# Altium PCB 400631.PcbDoc (part 6 of 8)
Units mm, origin at the board's own origin, x right, y up, seen from the top; angles counter-clockwise.
Board outline 136.53 x 63.5 mm, 4 copper layers (Top Layer, Mid-Layer 1, Mid-Layer 2, Bottom Layer), stack 1.52 mm thick; 366 components, 256 nets, 1485 pads, 1968 vias.
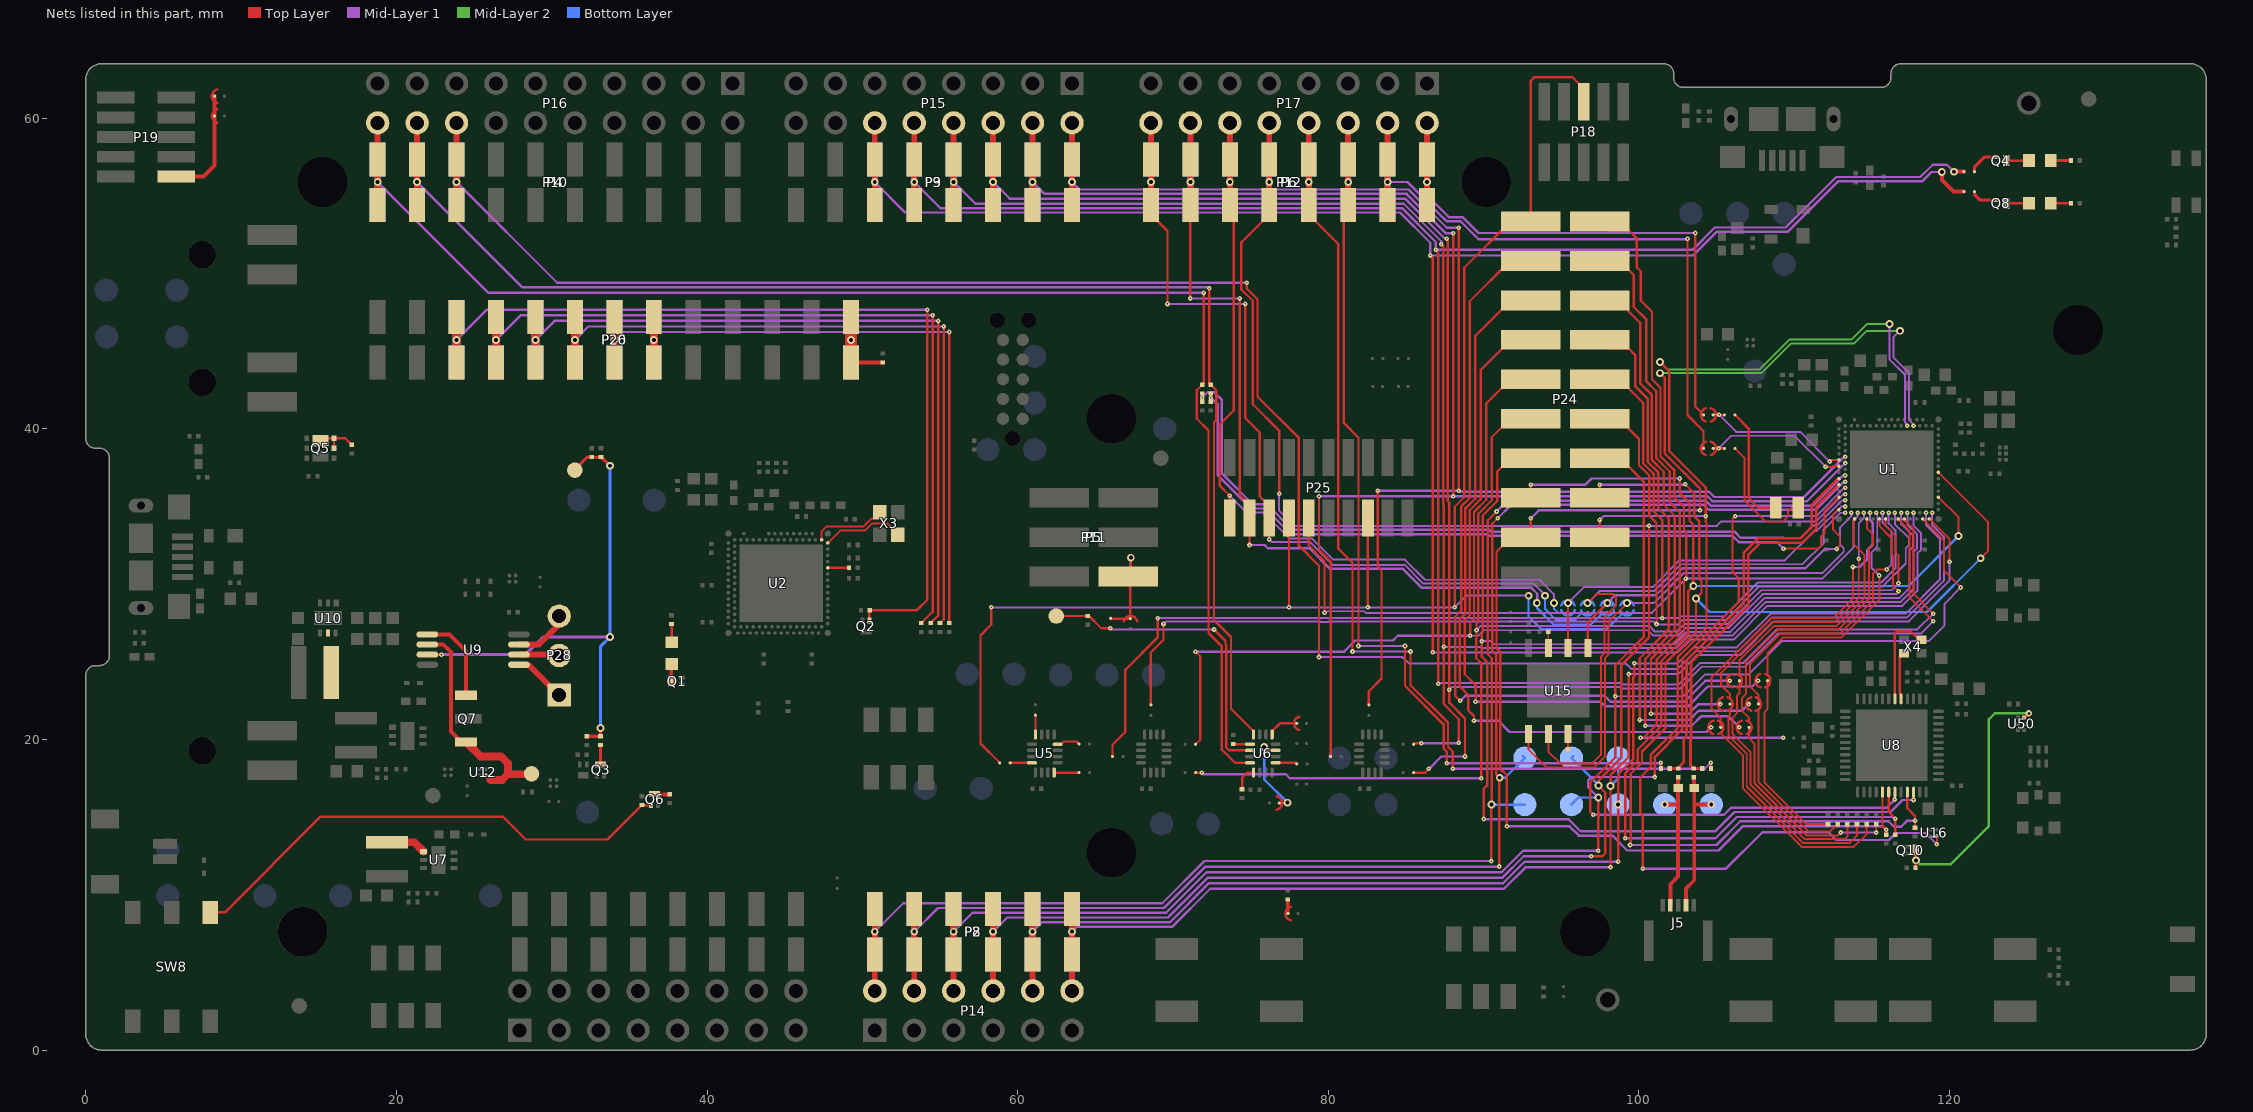
[diagram p6: the nets of this part, all layers, seen from the top]

## Via types
v1: diameter 0.5, hole 0.25, Top Layer to Bottom Layer, tented both sides, 1516 vias
v2: diameter 0.3, hole 0.1, Top Layer to Mid-Layer 1, tented top, 354 vias
v3: diameter 0.3, hole 0.1, Top Layer to Mid-Layer 1, tented both sides, 67 vias
v4: diameter 0.66, hole 0.33, Top Layer to Bottom Layer, tented both sides, 16 vias
v5: diameter 0.4, hole 0.2, Top Layer to Bottom Layer, tented both sides, 11 vias
v6: diameter 0.5, hole 0.3, Top Layer to Bottom Layer, tented both sides, 3 vias
v7: diameter 0.6, hole 0.3, Top Layer to Bottom Layer, tented both sides, 1 vias

## Nets (pads, with @x,y where several pads share a name; then routed paths per layer and width w, separated by ;. In a path a pad name is that pad's centre, name@x,y a point inside that pad or via, vN(x,y) a via of type N, cw(c..) or ccw(c..) an arc to the next point about the centre after c; other vN are vias at no path point) (continued)
NetL7_2: L7.2 U10.5
NetL8_1: L8.1 U7.1 | length 2.6
  Top Layer w0.508: L8.1@19.399,13.375 21.151,13.376 U7.1@21.751,12.775
NetLED1_1: LED1.1 Q4.3 | length 1.5
  Top Layer w0.152: Q4.3@123.65,57.261 125.104,57.261 LED1.1@125.109,57.266
NetLED1_2: LED1.2 R2.1 | length 1.3
  Top Layer w0.203: LED1.2@126.506,57.266 R2.1@127.808,57.266
NetLED2_1: LED2.1 Q8.3 | length 1.5
  Top Layer w0.152: Q8.3@123.65,54.511 125.104,54.511 LED2.1@125.109,54.516
NetLED2_2: LED2.2 R3.1 | length 1.3
  Top Layer w0.152: LED2.2@126.506,54.516 R3.1@127.808,54.516
NetLED5_1: LED5.1 Q1.3 | length 1.1
  Top Layer w0.203: Q1.3@37.699,23.749 37.699,24.834 LED5.1@37.719,24.854
NetLED5_2: LED5.2 R7.1 | length 1.2
  Top Layer w0.165: LED5.2@37.719,26.251 R7.1@37.719,27.426
NetP5_6: P5.6 P11.6 SB32.2 SB33.1 | length 6.7
  Top Layer w0.152: SB33.1@66.065,27.795 66.091,27.77 66.906,27.77 SB32.2@67.259,27.77 67.252,27.777 67.252,27.944 67.252,30.348 P5.6@67.119,30.48 67.285,30.645 v1(67.285,31.699)
  Bottom Layer w0.152: v1(67.285,31.699) 67.285,30.917 P11.6@67.722,30.48
NetP6_3: P6.3 P12.3 P17.6 R42.1 | length 63
  Top Layer w0.152: P6.3@81.28,54.661 P6.3@81.28,54.415 81.001,54.136 81.001,40.361 81.94,39.421 v3(81.94,26.01) ; v2(84.938,26.01) 84.938,23.453 87.425,20.965 87.425,19.415 87.63,19.21 v2(87.63,18.466) ; v2@101.372,18.528 v2(101.4,18.5) 101.404,18.496 101.404,18.131 R42.1@101.409,18.126
  Top Layer w0.381: P6.3@81.28,54.661 v1(81.28,55.88) P6.3@81.28,57.345 P17.6@81.28,59.69
  Mid-Layer 1 w0.152: v3(81.94,26.01) v2(84.938,26.01) ; v2(87.63,18.466) 101.326,18.466 101.36,18.5 v2(101.4,18.5)
  Bottom Layer w0.381: P12.3@81.28,54.415 v1(81.28,55.88) P12.3@81.28,57.345
NetP6_4: P6.4 P12.4 P17.8 R45.1 | length 67.7
  Top Layer w0.152: P6.4@78.74,54.415 78.74,53.797 80.645,51.892 80.645,32.28 81.559,31.366 v3(81.559,25.654) ; v2(85.293,25.654) 85.293,23.49 87.702,21.08 87.702,19.53 88.011,19.222 v2(88.011,18.11) ; v2(104.625,18.5) 104.635,18.49 104.635,18.136 R45.1@104.646,18.126
  Top Layer w0.381: P6.4@78.74,54.415 v1(78.74,55.88) P6.4@78.74,57.345 P17.8@78.74,59.69
  Mid-Layer 1 w0.152: v3(81.559,25.654) v2(85.293,25.654) ; v2(88.011,18.11) 104.235,18.11 v2(104.625,18.5)
  Bottom Layer w0.381: P12.4@78.74,54.415 v1(78.74,55.88) P12.4@78.74,57.345
NetP19_1: P19.1 SB19.2 SB47.2 | length 8.2
  Top Layer w0.254: P19.1@5.836,56.236 7.595,56.236 8.298,56.939 8.298,60.785 ; 8.298,59.785 SB19.2@8.298,60.138 8.298,60.491 8.298,61.055 SB47.2@8.298,61.408
NetP20_3: P20.3 P26.3 Q2.1 R25.1 | length 60.3
  Top Layer w0.152: Q2.1@50.453,27.636 50.453,28.298 R25.1@50.475,28.321 53.518,28.321 54.178,28.981 v3(54.178,47.65)
  Top Layer w0.508: P20.3@23.876,44.255 v1(23.876,45.72) P20.3@23.876,47.185
  Mid-Layer 1 w0.152: v1(23.876,45.72) 25.806,47.65 v3(54.178,47.65)
  Bottom Layer w0.508: P26.3@23.876,44.255 v1(23.876,45.72) P26.3@23.876,47.185
NetP20_4: P20.4 P26.4 R19.2 | length 54.6
  Top Layer w0.152: R19.2@53.797,27.488 54.534,28.225 v2(54.534,47.295)
  Top Layer w0.508: P20.4@26.416,44.348 P20.4@26.416,47.185
  Mid-Layer 1 w0.152: v1(26.416,45.72) 27.991,47.295 v2(54.534,47.295)
  Bottom Layer w0.508: P26.4@26.416,44.255 v1(26.416,45.72) P26.4@26.416,47.185
NetP20_5: P20.5 P26.5 R21.2 | length 52
  Top Layer w0.152: R21.2@54.398,27.488 54.889,27.979 v3(54.889,46.939)
  Top Layer w0.508: P20.5@28.956,44.255 P20.5@28.956,47.185
  Mid-Layer 1 w0.152: v1(28.956,45.72) 30.175,46.939 v3(54.889,46.939)
  Bottom Layer w0.508: P26.5@28.956,44.255 v1(28.956,45.72) P26.5@28.956,47.185
NetP20_6: P20.6 P26.6 R22.2 | length 49.8
  Top Layer w0.152: P20.6@31.496,43.663 P20.6@31.496,44.255 ; R22.2@54.999,27.488 55.245,27.734 v3(55.245,46.584)
  Top Layer w0.508: P20.6@31.496,44.255 v1(31.496,45.72) P20.6@31.496,47.185
  Mid-Layer 1 w0.152: v1(31.496,45.72) 32.36,46.584 v3(55.245,46.584)
  Bottom Layer w0.508: P26.6@31.496,44.255 v1(31.496,45.72) P26.6@31.496,47.185
NetP20_7: P20.7 P26.7 R23.2 | length 47
  Top Layer w0.152: P20.7@34.036,43.663 P20.7@34.036,44.255 ; R23.2@55.601,27.488 v2(55.601,46.228)
  Top Layer w0.508: P20.7@34.036,44.255 v1(34.036,45.72) P20.7@34.036,47.185
  Mid-Layer 1 w0.152: v1(34.036,45.72) 34.544,46.228 v2(55.601,46.228)
  Bottom Layer w0.508: P26.7@34.036,44.255 v1(34.036,45.72) P26.7@34.036,47.185
NetP20_8: P20.8 P26.8 | length 6.5
  Top Layer w0.152: P20.8@36.576,43.637 P20.8@36.576,44.255
  Top Layer w0.508: P20.8@36.576,44.255 v1(36.576,45.72) P20.8@36.576,47.185
  Bottom Layer w0.508: P26.8@36.576,44.255 v1(36.576,45.72) P26.8@36.576,47.185
NetP20_13: P20.13 P26.13 R75.2 | length 7.9
  Top Layer w0.254: P20.13@49.276,44.255 49.288,44.267 R75.2@51.308,44.267
  Top Layer w0.762: P20.13@49.276,44.255 P20.13@49.276,47.185
  Bottom Layer w0.762: P26.13@49.276,44.255 P26.13@49.276,47.185
  other v1: 49.276,45.72
NetP24_3: P24.3 SB22.2 | length 49.4
  Top Layer w0.152: v2(88.494,22.479) 88.175,22.798 88.175,27.9 88.55,28.275 88.55,34.987 89.103,35.54 89.103,48.209 91.694,50.8 P24.3@93.027,50.8
  Mid-Layer 1 w0.152: v2(88.494,22.479) 88.815,22.8 97.799,22.8 98.175,22.424 98.62,22.424 98.622,22.425 102.925,22.425 104.275,23.775 v2(105.838,23.775)
NetP24_4: P24.4 SB24.2 | length 37.5
  Top Layer w0.152: P24.4@97.472,50.8 98.031,50.241 99.314,50.241 99.665,49.89 99.665,47.835 100.475,47.025 100.475,43.05 101.111,42.414 101.111,38.109 101.985,37.235 101.985,37.198 101.991,37.192 101.991,35.259 102.625,34.625 102.625,27.015 100.775,25.165 v2(100.775,21.65)
  Mid-Layer 1 w0.152: v2(100.775,21.65) 103.2,21.65 103.8,22.25 105.213,22.25 v2(105.238,22.275)
NetP24_5: P24.5 SB25.2 | length 45.8
  Top Layer w0.152: v2(89.375,21.2) 89.375,21.5 89,21.875 89,22.593 89.002,22.595 89.002,22.873 88.473,23.402 88.473,27.69 88.475,27.692 88.475,27.75 88.825,28.1 88.825,28.158 88.827,28.16 88.827,34.872 89.459,35.503 89.459,45.974 91.745,48.26 P24.5@93.027,48.26
  Mid-Layer 1 w0.152: v2(89.375,21.2) 90.95,21.2 91.675,20.475 104.338,20.475 v2(104.638,20.775)
NetP24_6: P24.6 SB20.2 | length 37.5
  Top Layer w0.152: P24.6@97.472,48.26 98.742,48.26 99.301,47.701 99.301,47.599 100.075,46.825 100.075,42.925 100.833,42.167 100.833,37.994 101.6,37.227 101.6,35.1 102.3,34.4 102.3,27.083 100.4,25.183 100.4,21.397 100.401,21.395 100.401,21.105 100.4,21.103 v2(100.4,20.875)
  Mid-Layer 1 w0.152: v2(100.4,20.875) 103.4,20.875 104.025,21.5 105.738,21.5 v2(106.463,20.775)
NetP24_7: P24.7 SB21.2 | length 45.1
  Top Layer w0.152: v2(89.475,22.425) 89.484,22.434 89.484,23.491 88.783,24.192 88.783,27.666 89.102,27.985 89.102,28.043 89.105,28.045 89.105,34.757 89.814,35.466 89.814,43.79 91.745,45.72 P24.7@93.027,45.72
  Mid-Layer 1 w0.152: v2(89.475,22.425) 97.525,22.425 97.827,22.123 103.148,22.123 104.425,23.4 107.288,23.4 v2(107.663,23.775)
NetP24_8: P24.8 SB23.2 | length 35.3
  Top Layer w0.152: P24.8@97.472,45.72 98.031,45.161 99.339,45.161 99.75,44.751 99.75,42.75 100.556,41.944 100.556,37.879 101.25,37.185 101.25,34.875 101.925,34.2 101.925,27.1 100.05,25.225 v2(100.05,21.25)
  Mid-Layer 1 w0.152: v2(100.05,21.25) 103.25,21.25 103.85,21.85 106.638,21.85 v2(107.063,22.275)
NetP28_1: P28.1 U9.5 | length 3.4
  Top Layer w0.381: U9.5@27.893,24.806 28.509,24.806 30.455,22.86 P28.1@30.48,22.86
NetP28_2: P28.2 U9.6 | length 2.6
  Top Layer w0.381: U9.6@27.893,25.456 30.424,25.456 P28.2@30.48,25.4
NetP28_3: P28.3 U9.7 | length 3.7
  Top Layer w0.381: U9.7@27.893,26.106 29.179,26.106 30.48,27.407 P28.3@30.48,27.94
NetQ3_3: Q3.3 R12.2 | length 1.2
  Top Layer w0.203: Q3.3@33.147,18.384 R12.2@33.147,19.629
NetQ4_1: Q4.1 SB5.2 | length 1.9
  Top Layer w0.2: SB5.2@121.589,56.547 121.589,56.839 122.236,57.486 Q4.1@122.95,57.486
NetQ5_5: Q5.5 Q5.6 R51.2 | length 3
  Top Layer w0.152: Q5.6@15.113,39.21 15.288,39.385 Q5.6@15.988,39.385 Q5.6@16.058,39.385 ; Q5.5@16.063,38.735 15.988,38.81 15.988,39.31 16.063,39.385 16.704,39.385 17.046,39.043 17.046,39.028 17.105,38.969 R51.2@17.12,38.969
NetQ6_1: Q6.1 R61.1 SW8.4 | length 32.5
  Top Layer w0.152: SW8.4@8.028,8.859 8.959,8.859 15.125,15.025 26.85,15.025 28.325,13.55 33.596,13.55 R61.1@35.814,15.768 36.391,15.768 Q6.1@36.402,15.779
NetQ6_3: Q6.3 R58.2 | length 1
  Top Layer w0.254: Q6.3@36.627,16.479 36.641,16.465 R58.2@37.592,16.465
NetQ7_1: Q7.1 U9.1 | length 5.6
  Top Layer w0.254: U9.1@22.196,26.756 23.434,26.756 24.489,25.701 Q7.1@24.489,22.836
NetQ7_3: Q7.3 TP34.1 U9.2 U12.A1 | length 15
  Top Layer w0.25: U12.A1@25.778,17.682 26.065,17.394
  Top Layer w0.254: U9.2@22.196,26.106 23.018,26.106 23.51,25.614 23.51,20.509 24.182,19.836 Q7.3@24.489,19.836
  Top Layer w0.508: Q7.3@24.489,19.836 25.427,18.898 26.746,18.898 27.178,18.466 27.178,17.755 ; 26.065,17.394 26.818,17.394 27.178,17.755 ; TP34.1@28.651,17.856 28.55,17.755 27.178,17.755
NetQ8_1: Q8.1 SB6.2 | length 1.7
  Top Layer w0.2: SB6.2@121.589,55.27 121.589,55.086 121.939,54.736 Q8.1@122.95,54.736
NetQ10_3: Q10.3 R62.2 U50.6 | length 17
  Top Layer w0.152: R62.2@117.81,11.725 117.825,11.74 Q10.3@117.825,12.875 ; U50.6@124.8,21.4 124.849,21.449 124.887,21.449 125.1,21.662 v5(125.1,21.675)
  Mid-Layer 2 w0.152: v1(117.838,12.213) 118.1,11.95 120.05,11.95 122.525,14.425 122.525,21.3 122.9,21.675 v5(125.1,21.675)
NetR8_1: R8.1 R12.1 R70.1 R77.1 TP33.1 U9.3 | length 33.7
  Top Layer w0.152: R70.1@32.588,38.171 R77.1@33.172,38.171
  Top Layer w0.203: U9.3@21.993,25.456 v3(22.906,25.456) ; TP33.1@31.496,37.338 31.496,37.396 32.271,38.171 R70.1@32.588,38.171 ; R8.1@32.258,20.199 R12.1@33.147,20.199 v1(33.147,20.726) ; R77.1@33.172,38.171 33.203,38.171 v1(33.757,37.617)
  Mid-Layer 1 w0.203: v3(22.906,25.456) 28.301,25.456 29.439,26.594 v1(33.757,26.594)
  Bottom Layer w0.203: v1(33.147,20.726) 33.147,25.984 v1(33.757,26.594) v1(33.757,37.617)
NetR11_1: R11.1 U2.L31 | length 1.4
  Top Layer w0.152: U2.L31@47.776,31.048 49.055,31.048 R11.1@49.141,30.963
NetR47_1: R47.1 SB26.2 | length 0.9
  Top Layer w0.203: SB26.2@77.386,8.788 77.386,9.639 R47.1@77.394,9.646
NetR48_2: R48.2 U6.9 | length 1.1
  Top Layer w0.152: R48.2@73.889,19.705 73.902,19.691 U6.9@74.96,19.691
NetR49_2: R49.2 U6.13 | length 1.6
  Top Layer w0.152: R49.2@74.447,16.846 74.447,17.526 74.788,17.866 U6.13@75.185,17.866
NetR57_1: R57.1 SB33.2 TP19.1 U6.10 | length 20.1
  Top Layer w0.152: TP19.1@62.484,27.94 R57.1@64.592,27.94 ; R57.1@64.516,27.946 64.587,27.946 R57.1@64.592,27.94 ; SB33.2@66.046,27.153 v2(65.97,27.153) 65.38,27.153 R57.1@64.592,27.94 ; v2(72.644,27.076) 73.381,26.34 73.381,26.148 73.427,26.101 73.427,19.486 73.622,19.291 U6.10@74.96,19.291
  Mid-Layer 1 w0.152: v2@66.046,27.153 66.048,27.153 v2@66.073,27.127 ; v2@66.073,27.076 v2(72.644,27.076)
NetR65_1: R65.1 U15.3 | length 1
  Top Layer w0.125: R65.1@95.425,19.36 95.425,20.34 U15.3@95.435,20.35
NetR66_1: R66.1 U15.7 | length 1
  Top Layer w0.125: R66.1@94.16,26.925 94.16,25.895 U15.7@94.165,25.89
NetSB1_1: SB1.1 X2.1 | length 7.7
  Top Layer w0.152: SB1.1@106.18,40.894 107.061,40.013 107.061,35.535 107.682,34.914 X2.1@108.803,34.914
NetSB2_1: SB2.1 X2.2 | length 8.2
  Top Layer w0.125: SB2.1@106.18,38.735 106.782,38.133 106.782,35.382 108.153,34.011 109.245,34.011 109.601,34.366 109.601,34.671 109.844,34.914 X2.2@110.253,34.914
NetSB42_1: SB42.1 U6.1 | length 1.4
  Top Layer w0.152: U6.1@76.61,18.491 77.801,18.491 77.903,18.491 SB42.1@77.97,18.423
NetSB45_1: SB45.1 U6.5 | length 2
  Top Layer w0.152: U6.5@76.385,20.316 76.385,20.531 76.886,21.031 77.796,21.031 SB45.1@77.97,21.031
NetSB46_1: SB46.1 U6.3 | length 5.6
  Top Layer w0.152: v1(75.87,19.507) 76.086,19.291 U6.3@76.61,19.291 ; SB46.1@76.843,15.9 77.343,15.9 v1(77.368,15.926)
  Bottom Layer w0.152: v1(75.87,19.507) 75.87,17.424 v1(77.368,15.926)
NetSB54_2: SB54.2 U5.16 | length 1.6
  Top Layer w0.152: U5.16@62.347,17.866 62.357,17.856 SB54.2@63.95,17.856
NetSB55_2: SB55.2 U5.4 | length 1.5
  Top Layer w0.152: U5.4@62.572,19.691 62.795,19.691 62.967,19.863 63.797,19.863 SB55.2@63.95,19.71
NetSB56_2: SB56.2 U5.8 | length 1.2
  Top Layer w0.152: SB56.2@61.138,21.557 61.147,21.547 U5.8@61.147,20.316
NetSB57_2: SB57.2 U5.12 | length 1.4
  Top Layer w0.152: SB57.2@59.52,18.491 U5.12@60.922,18.491
NetU2_B30: U2.B30 X3.3 | length 4.6
  Top Layer w0.125: U2.B30@47.376,32.848 47.376,33.396 47.678,33.698 50.072,33.698 50.606,34.232 50.764,34.232 X3.3@51.011,34.48
NetU2_C31: U2.C31 X3.1 | length 5.3
  Top Layer w0.125: U2.C31@47.776,32.648 47.8,32.648 48.588,33.436 50.164,33.436 50.614,33.886 51.635,33.886 52.276,33.245 X3.1@52.276,33.178
NetU8_17: U8.17 X4.1 | length 3.1
  Top Layer w0.152: U8.17@116.878,22.609 116.878,22.872 116.799,22.951 116.799,25.349 116.875,25.425 X4.1@117.05,25.425
NetU8_18: U8.18 X4.3 | length 6.3
  Top Layer w0.152: U8.18@116.478,22.609 116.478,26.828 116.6,26.95 117.5,26.95 117.951,26.499 117.951,26.474 118.15,26.275 X4.3@118.2,26.275
NFC1: C43.1 J5.2 R43.1 TP17.1 | length 9.4
  Top Layer w0.25: v1(101.656,15.799) 102.425,15.799 102.524,15.7 ; J5.2@102.024,9.328 102.024,10.674 102.524,11.174 102.524,15.7 ; R43.1@102.522,17.563 C43.1@102.524,16.875 C43.1@102.524,16.875 102.524,15.7
NFC2: C44.2 J5.4 R46.1 TP18.1 | length 9.6
  Top Layer w0.25: J5.4@103.024,9.328 103.024,10.399 103.556,10.931 103.556,15.818 ; R46.1@103.532,17.563 103.532,16.899 C44.2@103.556,16.875 103.556,15.818 ; v1(104.656,15.799) 103.575,15.799 103.556,15.818
P0.00: P6.1 P12.1 P17.2 SB3.2 | length 39.3
  Top Layer w0.152: v2(103.624,52.601) 103.624,41.427 104.009,41.043 SB3.2@104.158,40.894
  Top Layer w0.381: P6.1@86.36,54.415 v1(86.36,55.88) P6.1@86.36,57.345 P17.2@86.36,59.69
  Mid-Layer 1 w0.152: v1(86.36,55.88) 86.36,55.016 87.751,53.625 88.639,53.625 89.662,52.601 v2(103.624,52.601)
  Bottom Layer w0.381: P12.1@86.36,54.415 v1(86.36,55.88) P12.1@86.36,57.345
P0.00/XL1: SB1.2 SB3.1 U1.N1 | length 9.7
  Top Layer w0.125: SB3.1@104.783,40.894 104.957,40.894 v2(105.156,40.894) SB1.2@105.504,40.894 ; v2(112.293,37.887) 112.395,37.989 U1.N1@112.878,37.989
  Mid-Layer 1 w0.125: v2(105.156,40.894) 106.248,39.802 110.379,39.802 v2(112.293,37.887)
P0.01: P6.2 P12.2 P17.4 SB4.2 | length 43
  Top Layer w0.152: v2(103.124,52.228) 103.124,40.876 104.158,39.842 SB4.2@104.158,38.735
  Top Layer w0.381: P6.2@83.82,54.415 v1(83.82,55.88) P6.2@83.82,57.345 P17.4@83.82,59.69
  Mid-Layer 1 w0.152: v1(83.82,55.88) 85.09,55.88 87.395,53.575 87.409,53.575 87.636,53.348 88.524,53.348 89.671,52.2 103.096,52.2 v2(103.124,52.228)
  Bottom Layer w0.381: P12.2@83.82,54.415 v1(83.82,55.88) P12.2@83.82,57.345
P0.01/XL2: SB2.2 SB4.1 U1.R1 | length 9.7
  Top Layer w0.125: v2(112.014,37.541) 112.446,37.541 112.493,37.589 U1.R1@112.878,37.589
  Top Layer w0.152: SB4.1@104.783,38.735 104.957,38.735 v2(105.131,38.735) SB2.2@105.504,38.735
  Mid-Layer 1 w0.125: v2(105.131,38.735) 105.943,39.548 110.007,39.548 v2(112.014,37.541)
P0.02/NFC1: R42.2 R43.2 U1.W1 | length 25.1
  Top Layer w0.165: R42.2@101.979,18.126 102.476,18.126 102.875,18.525 102.875,19.98 103.034,20.138 103.034,20.482 103.061,20.51 103.061,25.071 106.735,28.745 106.735,31.995 107.696,32.956 110.401,32.956 111.118,33.673 111.118,35.091 112.815,36.789 U1.W1@112.878,36.789
P0.03/NFC2: R45.2 R46.2 U1.AA1 | length 24.5
  Top Layer w0.165: R45.2@104.076,18.126 104.069,18.133 103.517,18.133 103.464,18.186 103.464,18.201 103.317,18.347 103.317,20.012 103.351,20.046 103.351,24.951 107.025,28.625 107.025,31.875 107.816,32.666 110.543,32.666 111.408,33.531 111.408,34.971 112.825,36.389 U1.AA1@112.878,36.389
P0.04/AIN0: P2.1 P8.1 P14.2 TP42.1 U1.V2 | length 99.1
  Top Layer w0.152: v2(90.5,12.167) v1(90.5,15.799) 90.523,15.821 90.523,25.227 90.275,25.475 90.275,34.104 90.83,34.66 v2(90.83,34.671)
  Top Layer w0.381: P14.2@50.8,3.81 P2.1@50.8,6.155 v1(50.8,7.62) P2.1@50.8,9.085
  Mid-Layer 1 w0.152: v1(50.8,7.62) 52.629,9.449 69.303,9.449 72.021,12.167 v2(90.5,12.167) ; v2(90.83,34.671) 91.531,35.372 104.064,35.372 104.294,35.372 104.613,35.052 111.202,35.052 113.11,36.961 113.249,36.961 v2(113.278,36.989)
  Bottom Layer w0.152: v1(90.5,15.799) TP42.1@92.656,15.799
  Bottom Layer w0.381: P8.1@50.8,6.155 v1(50.8,7.62) P8.1@50.8,9.677
P0.05/AIN1: P2.2 P8.2 P14.4 TP43.1 U1.Y2 | length 96.3
  Top Layer w0.152: v2(90.907,34.239) 90.552,33.885 90.552,25.698 90.8,25.45 90.8,17.757 v1(91.031,17.526) ; v2(91.008,11.811) v1@91.008,17.526
  Top Layer w0.381: P14.4@53.34,3.81 P2.2@53.34,6.155 v1(53.34,7.62) P2.2@53.34,9.085
  Mid-Layer 1 w0.152: v1(53.34,7.62) 54.864,9.144 69.429,9.144 72.096,11.811 v2(91.008,11.811) ; v2(90.907,34.239) 91.762,35.095 104.179,35.095 104.498,34.775 111.381,34.775 113.195,36.589 v2(113.278,36.589)
  Bottom Layer w0.152: v1(91.031,17.526) 91.383,17.526 TP43.1@92.656,18.799 TP43.1@92.529,18.926
  Bottom Layer w0.381: P8.2@53.34,6.155 v1(53.34,7.62) P8.2@53.34,9.085
P0.06/AIN2: P2.3 P8.3 P14.6 TP44.1 U1.AB2 | length 90.1
  Top Layer w0.152: v2(97.384,12.827) 97.384,14.987 97.401,15.005 97.401,15.295 97.384,15.313 v1(97.384,16.256) ; v2(101.025,17.575) 101.025,18.875 102.777,20.627 102.777,25.189 106.425,28.836 106.425,30.375 106.025,30.775 106.025,34.2 v2(106.2,34.375)
  Top Layer w0.381: P14.6@55.88,3.81 P2.3@55.88,6.155 v1(55.88,7.62) P2.3@55.88,9.085
  Mid-Layer 1 w0.125: v2(106.2,34.375) 111.413,34.375 113.194,36.155 113.244,36.155 v2(113.278,36.189)
  Mid-Layer 1 w0.152: v1(55.88,7.62) 57.099,8.839 69.555,8.839 72.172,11.455 91.161,11.455 92.532,12.827 v2(97.384,12.827) ; v1(97.384,16.256) 96.72,16.92 96.72,17.345 96.95,17.575 v2(101.025,17.575)
  Bottom Layer w0.152: TP44.1@95.656,15.799 96.114,16.256 v1(97.384,16.256)
  Bottom Layer w0.381: P8.3@55.88,6.155 v1(55.88,7.62) P8.3@55.88,9.085
P0.07/AIN3: P2.4 P6.5 P8.4 P12.5 P14.8 P17.10 TP45.1 U1.AD2 | length 142.8
  Top Layer w0.152: P6.5@76.2,54.61 P6.5@76.2,54.415 76.2,53.797 74.397,51.994 74.397,48.971 75.133,48.235 75.133,41.58 76.835,39.878 v2(76.835,35.814) ; v2(96.926,12.471) 97.646,12.471 97.835,12.66 97.835,16.578 v1(97.387,17.025) 97.401,17.039 97.401,17.351 98.85,18.8 98.85,24.75 100.65,26.55 v2(100.65,33.75)
  Top Layer w0.381: P14.8@58.42,3.81 P2.4@58.42,6.155 v1(58.42,7.62) P2.4@58.42,9.085 ; P6.5@76.2,54.61 v1(76.2,55.88) P6.5@76.2,57.345 P17.10@76.2,59.69
  Mid-Layer 1 w0.125: v2(76.835,35.814) 76.835,34.728 77.813,33.75 105.022,33.75 105.308,34.036 111.401,34.036 v2@113.154,35.789
  Mid-Layer 1 w0.152: v1(58.42,7.62) 59.334,8.534 69.682,8.534 72.247,11.1 91.211,11.1 92.583,12.471 v2(96.926,12.471)
  Bottom Layer w0.152: TP45.1@95.783,18.926 TP45.1@95.656,18.799 97.387,17.068 v1(97.387,17.025)
  Bottom Layer w0.381: P8.4@58.42,6.155 v1(58.42,7.62) P8.4@58.42,9.652 ; P12.5@76.2,54.415 v1(76.2,55.88) P12.5@76.2,57.345
  other v2: 113.278,35.789
P0.08: SB11.2 U1.AH2 U15.6 | length 23.3
  Top Layer w0.125: v1(95.425,28.775) 95.425,25.9 U15.6@95.435,25.89
  Mid-Layer 1 w0.125: v1(95.425,28.775) 96.45,29.8 100.875,29.8 102.6,31.525 109.4,31.525 111.275,33.4 111.429,33.4 113.018,34.989 v2(113.278,34.989)
P0.08/TRACEDATA3: P6.6 P12.6 P17.12 P25.20 SB11.1 | length 54.6
  Top Layer w0.152: P25.20@73.66,34.245 v2(73.66,35.687) 73,36.347 73,40.259 73.914,41.173 73.914,54.458 P6.6@73.66,54.712
  Top Layer w0.381: P6.6@73.66,54.712 v1(73.66,55.88) P6.6@73.66,57.345 P17.12@73.66,59.69
  Mid-Layer 1 w0.125: v2(73.66,35.687) 74.747,34.6 75.825,34.6 77.479,32.946 78.933,32.946 80.304,31.575 84.925,31.575 86.225,30.275 93.6,30.275 94.525,29.35 v1(94.525,28.775)
  Bottom Layer w0.125: v1(94.525,28.775) 94.525,28.42 94.795,28.15 95.072,28.15 SB11.1@95.425,28.15
  Bottom Layer w0.381: P12.6@73.66,54.415 v1(73.66,55.88) P12.6@73.66,57.345
P0.09: SB12.2 U1.AJ1 U15.5 | length 23.1
  Top Layer w0.125: v2(112.725,32.258) 112.928,32.461 112.928,33.088 112.478,33.539 112.478,34.471 112.796,34.789 U1.AJ1@112.878,34.789
  Top Layer w0.152: U15.5@96.705,25.89 96.705,27.515 v1(97.965,28.775)
  Mid-Layer 1 w0.152: v1(97.965,28.775) 98.465,29.275 101.076,29.275 102.813,31.011 110.711,31.011 111.958,32.258 v2(112.725,32.258)
  Bottom Layer w0.152: v1@97.808,28.775 97.968,28.616 98.239,28.616
P0.09/TRACEDATA2: P6.7 P12.7 P17.14 P25.18 SB12.1 | length 59.6
  Top Layer w0.125: v2@74.93,32.563 P25.18@74.93,34.245
  Top Layer w0.152: v2(71.12,48.387) P6.7@71.12,54.415 ; v2(74.295,48.387) 74.295,35.738 74.93,35.103 P25.18@74.93,34.245
  Top Layer w0.381: P6.7@71.12,54.415 v1(71.12,55.88) P6.7@71.12,57.345 P17.14@71.12,59.69
  Mid-Layer 1 w0.152: v2(71.12,48.387) v2(74.295,48.387) ; v2(74.93,32.512) 75.888,32.512 76.1,32.3 78.775,32.3 80.1,30.975 84.799,30.975 86.024,29.75 93.075,29.75 93.45,29.375 93.45,28.8 v1(93.425,28.775)
  Bottom Layer w0.152: v1(93.425,28.775) 93.435,28.765 93.435,28.449 94.508,27.375 96.9,27.375 97.612,28.087 97.612,28.15 SB12.1@97.965,28.15
  Bottom Layer w0.381: P12.7@71.12,54.415 v1(71.12,55.88) P12.7@71.12,57.345
P0.10: SB13.2 U1.AK2 U15.2 | length 37.3
  Top Layer w0.125: U15.2@94.165,20.35 94.165,19.214 94.929,18.45 97.007,18.45 97.553,18.995 97.553,25.331 97.775,25.554 97.775,27.875 98.525,28.625 98.525,29.15 98.325,29.35 97.27,29.35 v1(96.695,28.775) ; v1@96.617,28.775 v1@96.656,28.814
  Mid-Layer 1 w0.125: v1(96.695,28.775) 97.459,29.539 100.967,29.539 102.704,31.275 110.525,31.275 111.887,32.637 111.887,33.503 112.973,34.589 v2(113.278,34.589)
P0.10/TRACEDATA1: P6.8 P12.8 P17.16 P25.16 SB13.1 | length 59.2
  Top Layer w0.152: P6.8@68.58,54.415 68.58,53.797 69.647,52.73 v2(69.647,48.031) ; v2(74.651,48.031) 74.651,40.691 75.59,39.751 75.59,35.636 76.2,35.027 P25.16@76.2,34.245 v2(76.2,32.868)
  Top Layer w0.381: P6.8@68.58,54.415 v1(68.58,55.88) P6.8@68.58,57.345 P17.16@68.58,59.69
  Mid-Layer 1 w0.125: v2(76.2,32.868) 76.372,32.696 78.829,32.696 80.286,31.239 84.908,31.239 86.121,30.025 93.225,30.025 93.95,29.3 v1@93.95,29.225
  Mid-Layer 1 w0.152: v2(69.647,48.031) v2(74.651,48.031)
  Bottom Layer w0.125: v1@93.95,29.225 93.95,28.4 94.675,27.675 95.85,27.675 96.325,28.15 96.342,28.15 SB13.1@96.695,28.15
  Bottom Layer w0.381: P12.8@68.58,54.415 v1(68.58,55.88) P12.8@68.58,57.345
  other v1: 93.95,29.25
P0.11: SB14.2 U1.AK4 U15.1 | length 35.4
  Top Layer w0.125: U15.1@92.895,20.35 92.895,19.33 94.025,18.2 97.111,18.2 97.803,18.892 97.803,25.228 98.025,25.45 98.025,27.565 v1(99.235,28.775)
  Mid-Layer 1 w0.125: v1(99.235,28.775) 100.949,28.775 102.899,30.725 111.821,30.725 113.182,32.086 113.182,32.309 112.928,32.563 112.928,33.63 113.678,34.379 v2(113.678,34.589)
P0.11/TRACEDATA0: P18.6 P24.1 P25.6 P25.14 SB14.1 SB57.1 | length 108.2
  Top Layer w0.152: v3(58.293,28.499) 58.293,27.381 57.607,26.695 57.607,19.728 SB57.1@58.844,18.491 ; v3(77.47,28.499) P25.14@77.47,34.245 ; v2(82.55,28.499) P25.6@82.55,34.245 ; v2(88.138,28.499) 88.138,34.976 88.748,35.585 88.748,50.368 91.719,53.34 P24.1@94.285,53.34 ; P24.1@93.027,53.34 93.027,62.395 93.269,62.636 95.707,62.636 96.444,61.9 P18.6@96.444,61.056
  Mid-Layer 1 w0.125: v3(58.293,28.499) v3(77.47,28.499) v2(82.55,28.499) v2(88.138,28.499) 88.889,29.25 v1(92.9,29.25)
  Bottom Layer w0.125: v1@92.9,29.225 92.9,27.9 93.695,27.105 97.93,27.105 98.926,28.101 98.975,28.15 SB14.1@99.235,28.15
P0.12/TRACECLK: P24.2 P25.12 SB7.1 U1.AK6 | length 91.6
  Top Layer w0.152: P25.12@78.74,34.245 78.74,32.5 79.123,32.117 79.123,32.085 79.756,31.452 v2(79.756,28.143) ; P24.2@97.472,53.34 98.031,52.781 99.344,52.781 99.85,52.275 99.85,50.4 100.112,50.137 100.112,48.25 100.838,47.525 100.838,43.187 101.388,42.637 101.388,38.224 102.262,37.35 102.262,37.313 102.268,37.307 102.268,35.582 102.895,34.955 102.895,34.747 102.902,34.74 102.902,33.498 103.042,33.358 103.042,30.367 v2(103.025,30.35) 103.025,30.31 102.902,30.187 102.902,26.9 101.15,25.148 101.15,20.962 100.31,20.121 100.121,20.121 v2(100.1,20.1)
  Mid-Layer 1 w0.125: v2(79.756,28.143) 79.803,28.143 79.909,28.249 82.323,28.249 82.422,28.15 100.825,28.15 v2(103.025,30.35) 111.8,30.35 113.817,32.367 113.817,34.106 114.078,34.366 v2(114.078,34.589)
  Mid-Layer 1 w0.152: v2@100.075,20.1 v2(100.1,20.1) v2(109.287,20.1)
P0.13/QSPI0: R28.1 SB22.1 U1.AL5 | length 32
  Top Layer w0.125: SB22.1@106.462,23.775 106.462,23.422 106.462,22.965 106.325,22.828 106.325,21.7 106.022,21.397 106.022,20.335 107.187,19.17 107.187,17.07 110.682,13.575 112.537,13.575 113.25,13.575 113.415,13.74 R28.1@113.415,14.54 ; 106.462,24.128 106.462,25.08 108.695,27.313 112.729,27.313 114.525,29.109 114.525,31.855 113.817,32.563 113.817,34.128 U1.AL5@113.878,34.189
P0.14/QSPI1: R29.1 SB24.1 U1.AK8 | length 33.4
  Top Layer w0.125: 105.862,21.922 105.862,21.898 105.862,21.591 105.772,21.501 105.772,20.231 106.937,19.066 106.937,16.966 110.579,13.325 112.641,13.325 113.55,13.325 114.035,13.81 R29.1@114.035,14.54 ; 105.862,22.628 105.862,22.913 105.275,23.5 105.275,24.246 108.592,27.563 112.626,27.563 114.15,29.087 v2(114.15,31.625)
  Mid-Layer 1 w0.125: v2(114.15,31.625) 114.15,33.925 114.478,34.253 v2(114.478,34.589)
P0.15/QSPI2: R31.1 SB25.1 U1.AK10 | length 35.7
  Top Layer w0.125: 105.2,20.382 105.268,20.382 106.687,18.963 106.687,17.145 106.687,16.863 110.475,13.075 112.744,13.075 113.825,13.075 114.655,13.905 R31.1@114.655,14.54 ; SB25.1@105.262,20.775 105.262,21.128 105.262,21.388 104.675,21.975 104.675,24 108.488,27.813 112.522,27.813 113.775,29.066 v2(113.775,31.1)
  Mid-Layer 1 w0.152: v2(113.775,31.1) 114.203,31.1 114.681,31.578 114.681,32.157 115.062,32.537 115.062,33.935 114.878,34.119 v2(114.878,34.589)
P0.16/QSPI3: R30.1 SB20.1 U1.AL9 | length 32.8
  Top Layer w0.125: SB20.1@107.087,20.775 107.087,20.422 107.087,20.063 107.437,19.713 107.437,17.455 107.437,17.173 110.786,13.825 112.434,13.825 112.825,13.825 v2(113,14) ; 107.087,21.128 107.087,21.388 106.622,21.853 106.622,22.647 106.903,22.928 106.903,25.028 108.938,27.063 112.833,27.063 114.808,29.038 114.808,32.284 115.062,32.537 115.062,33.198 114.678,33.582 U1.AL9@114.678,34.189 ; v2(115.275,14) R30.1@115.275,14.54
  Mid-Layer 1 w0.125: v2(113,14) v2(115.275,14)
P0.17/QSPI_CLK: R27.1 SB21.1 U1.AK12 | length 27.9
  Top Layer w0.125: SB21.1@108.287,23.775 108.287,23.422 108.287,21.962 108.075,21.75 108.075,17.243 110.778,14.54 R27.1@112.175,14.54 ; 108.287,24.128 108.287,25.562 109.288,26.563 113.04,26.563 115.475,28.998 v2(115.475,30.55)
  Mid-Layer 1 w0.125: v2(115.278,34.589) 115.341,34.525 115.341,32.385 114.96,32.004 114.96,31.065 v2(115.475,30.55)
P0.18/QSPI_CS: R26.1 SB23.1 U1.AK14 | length 30.4
  Top Layer w0.125: 107.687,21.922 107.687,17.277 110.889,14.075 112.33,14.075 112.708,14.453 112.708,14.468 112.78,14.54 R26.1@112.795,14.54 ; SB23.1@107.687,22.275 107.687,22.628 107.687,22.637 107.687,22.655 107.687,22.863 107.153,23.397 107.153,24.878 109.088,26.813 112.936,26.813 115.062,28.939 115.062,30.652 115.348,30.937 v2(115.951,30.937)
  Mid-Layer 1 w0.125: v2(115.678,34.589) 115.678,33.979 116.256,33.401 116.256,31.242 v2(115.951,30.937)
P0.19: P24.9 SB51.1 U1.AL13 | length 77.4
  Top Layer w0.125: U1.AL13@115.478,34.189 115.478,33.739 116.253,32.964 116.253,31.897 116.35,31.8 116.35,29.903 v2(116.713,29.54)
  Top Layer w0.152: v2(71.45,25.65) 71.75,25.35 71.75,19.977 SB51.1@71.458,19.685 ; v2(89.134,26.67) 89.134,27.525 89.248,27.638 89.248,27.64 89.38,27.772 89.38,27.928 89.382,27.93 89.382,34.642 90.17,35.43 90.17,41.631 91.719,43.18 P24.9@93.027,43.18
  Mid-Layer 1 w0.125: v2(89.134,26.67) 89.661,26.67 90.016,27.025 100.571,27.025 100.896,26.7 102.533,26.7 103.008,27.175 105.786,27.175 107.961,29.35 116.552,29.35 116.713,29.511 v2(116.713,29.54)
  Mid-Layer 1 w0.152: v2(71.45,25.65) 81.022,25.65 81.737,26.365 84.165,26.365 84.47,26.67 v2(89.134,26.67)
P0.20: P24.10 SB53.1 U1.AK16 | length 80.5
  Top Layer w0.152: SB53.1@66.109,18.891 66.109,19.659 66.925,20.475 66.925,24.475 69.012,26.562 v2(69.012,27.788) ; P24.10@97.472,43.18 98.031,42.621 99.314,42.621 100.278,41.657 100.278,37.764 100.95,37.092 100.95,34.675 101.5,34.125 101.5,28.6 v2(101.5,27.8)
  Mid-Layer 1 w0.125: v2(69.012,27.788) 69.024,27.8 69.422,27.8 69.447,27.825 79.597,27.825 79.616,27.806 79.896,27.806 79.915,27.825 101.475,27.825 v2(101.5,27.8) 101.525,27.825 102.597,27.825 102.697,27.925 105.475,27.925 107.65,30.1 115.596,30.1 116.51,31.013 116.51,33.477 116.078,33.909 v2(116.078,34.589)
P0.21: P24.11 SB50.1 U1.AL15 | length 77.2
  Top Layer w0.125: U1.AL15@115.878,34.189 115.878,33.739 116.503,33.114 116.503,33.067 116.503,32.022 116.71,31.815 116.71,31.136 v2(116.71,30.045)
  Top Layer w0.152: SB50.1@71.458,17.856 v2(71.857,17.856) ; v2(89.85,17.5) 89.84,17.51 89.84,24.91 89.524,25.226 89.524,26.47 89.54,26.486 v2(89.54,27.026) 89.54,27.425 89.657,27.542 89.657,27.813 89.66,27.815 89.66,34.527 90.526,35.393 90.526,39.446 91.719,40.64 P24.11@93.027,40.64
  Mid-Layer 1 w0.125: v2(89.54,27.026) 89.814,27.3 100.65,27.3 101,26.95 102.429,26.95 102.904,27.425 105.682,27.425 107.857,29.6 116.265,29.6 v2(116.71,30.045)
  Mid-Layer 1 w0.152: v2(71.857,17.856) 71.958,17.755 77.267,17.755 77.521,17.5 v2(89.85,17.5)
P0.22: P24.12 SB52.1 U1.AK18 | length 74.3
  Top Layer w0.152: SB52.1@68.574,22.225 68.574,25.597 69.393,26.416 v2(69.393,27.432) ; P24.12@97.472,40.64 98.742,40.64 99.301,40.081 99.301,40.043 100.001,39.343 100.001,37.649 100.673,36.977 100.673,34.377 101.125,33.925 v2(101.125,27.425)
  Mid-Layer 1 w0.125: v2(69.393,27.432) 69.407,27.432 69.55,27.575 79.493,27.575 79.513,27.556 79.999,27.556 80.019,27.575 100.974,27.575 v2(101.125,27.425) 101.15,27.4 102.525,27.4 102.8,27.675 105.579,27.675 107.754,29.85 115.7,29.85 115.8,29.95 115.802,29.95 117.175,31.323 117.175,32.314 117.399,32.537 117.399,32.944 116.478,33.865 v2(116.478,34.589)
P0.23: P24.13 U1.AK20 U8.46 | length 89.2
  Top Layer w0.152: v2(90,14.875) 90,16.8 90.225,17.025 90.225,24.975 89.875,25.325 v2(89.875,26.325) 89.875,26.864 89.937,26.926 89.937,34.412 90.881,35.356 90.881,37.236 91.745,38.1 P24.13@93.027,38.1 ; v2(117.675,16.1) 117.676,16.101 U8.46@117.678,16.609 U8.46@117.678,16.609
  Mid-Layer 1 w0.125: v2(89.875,26.325) 90.45,26.325 90.65,26.125 102.311,26.125 103.111,26.925 105.889,26.925 108.064,29.1 116.754,29.1 117.425,29.771 117.425,32.183 117.653,32.41 117.653,33.096 116.878,33.871 v2(116.878,34.589)
  Mid-Layer 1 w0.152: v2(90,14.875) 90.025,14.85 95.475,14.85 96.246,14.079 104.904,14.079 106.15,15.325 116.2,15.325 116.975,16.1 v2(117.675,16.1)
P0.24: P24.14 U1.AL27 U8.43 | length 78.1
  Top Layer w0.125: U1.AL27@118.278,34.165 119.65,32.792 119.65,30.85 v2(120.722,29.779)
  Top Layer w0.152: v2(97.05,15.15) 96.864,15.336 96.864,17.216 98.475,18.827 v2(98.475,22.775) 98.475,24.767 100.3,26.592 100.3,33.603 100.299,33.605 100.299,33.895 100.3,33.897 100.3,36.606 98.806,38.1 P24.14@97.472,38.1 ; v2(116.475,16.125) v2(116.475,16.125) 116.476,16.607 U8.43@116.478,16.609
  Mid-Layer 1 w0.125: v2(98.475,22.775) 102.85,22.775 104.25,24.175 107.028,24.175 109.178,26.325 118.65,26.325 119.675,27.35 119.675,28.732 v2(120.722,29.779)
  Mid-Layer 1 w0.152: v2(97.05,15.15) 105.475,15.15 105.927,15.602 115.952,15.602 v2(116.475,16.125)
P0.25/AIN4: P2.5 P8.5 P14.10 TP46.1 U1.AK28 | length 88.1
  Top Layer w0.152: v2@98.656,12.116 v1(98.656,15.799) 98.656,17.756 99.638,18.738 99.638,24.002 99.697,24.061 v2@99.697,24.89
  Top Layer w0.381: P14.10@60.96,3.81 P2.5@60.96,6.155 v1(60.96,7.62) P2.5@60.96,9.085
  Mid-Layer 1 w0.125: v2(99.699,24.892) 102.492,24.892 103.525,25.925 106.303,25.925 108.478,28.1 117.168,28.1 119.38,30.312 119.38,32.918 118.478,33.821 v2(118.478,34.589)
  Mid-Layer 1 w0.152: v1(60.96,7.62) 61.57,8.23 69.808,8.23 72.323,10.744 91.262,10.744 92.634,12.116 v2(98.654,12.116)
  Bottom Layer w0.381: P8.5@60.96,6.155 v1(60.96,7.62) P8.5@60.96,9.652
P0.26/AIN5: P2.6 P8.6 P14.12 TP47.1 U1.AL29 | length 87.2
  Top Layer w0.125: U1.AL29@118.678,34.165 118.73,34.165 119.99,32.905 v2(119.99,31.445)
  Top Layer w0.152: v2(98.171,11.76) v1@98.171,17 ; v1(98.175,17) 98.175,17.7 99.346,18.871 v2(99.346,24.206)
  Top Layer w0.381: P14.12@63.5,3.81 P2.6@63.5,6.155 v1(63.5,7.62) P2.6@63.5,9.085
  Mid-Layer 1 w0.125: v2(99.346,24.206) 102.513,24.206 103.732,25.425 106.51,25.425 108.685,27.6 117.375,27.6 119.99,30.215 v2(119.99,31.445)
  Mid-Layer 1 w0.152: v1(63.5,7.62) 63.805,7.925 69.934,7.925 72.398,10.389 91.313,10.389 92.685,11.76 v2(98.171,11.76)
  Bottom Layer w0.152: v1(98.175,17) 98.656,17.481 TP47.1@98.656,18.799
  Bottom Layer w0.381: P8.6@63.5,6.155 v1(63.5,7.62) P8.6@63.5,9.085
P0.27/AIN6: P4.8 P10.8 P16.16 U1.AK30 | length 136.5
  Top Layer w0.152: P4.8@23.876,53.848 P4.8@23.876,54.415 ; v2(74.752,49.403) 74.752,49.022 75.438,48.336 75.438,42.062 78.105,39.395 78.105,32.475 79.4,31.18 v2@79.4,25.349
  Top Layer w0.381: P4.8@23.876,54.415 v1(23.876,55.88) P4.8@23.876,57.345 P16.16@23.876,59.69
  Mid-Layer 1 w0.125: v2(79.4,25.298) 84.777,25.298 85.183,24.892 99.133,24.892 99.489,24.536 102.49,24.536 103.629,25.675 106.407,25.675 108.582,27.85 117.272,27.85 119.634,30.213 119.634,33.045 118.878,33.802 v2(118.878,34.589)
  Mid-Layer 1 w0.152: v1(23.876,55.88) 30.353,49.403 v2(74.752,49.403)
  Bottom Layer w0.381: P10.8@23.876,53.848 v1(23.876,55.88) P10.8@23.876,57.345
P0.28/AIN7: P24.15 R37.1 U1.AE31 U8.42 | length 78.3
  Top Layer w0.125: U1.AE31@119.278,35.589 120.578,34.289 v1(120.578,33.086)
  Top Layer w0.152: P24.15@93.027,35.56 v2(93.027,36.385) ; v2(99.125,13.625) 99.125,17.833 99.915,18.623 99.915,19.335 101.427,20.847 101.427,25.033 103.18,26.786 103.18,29.555 v1(103.5,29.875) 103.5,33.825 103.25,34.075 103.25,35.225 102.619,35.856 v2(102.619,36.793) ; U8.42@116.078,16.609 116.078,15.322 v2(116.5,14.9) R37.1@116.5,13.86
  Mid-Layer 1 w0.152: v2(93.027,36.385) 96.533,36.385 96.941,36.793 v2(102.619,36.793) ; v2(99.125,13.625) 104.915,13.625 106.293,15.002 116.358,15.002 116.46,14.9 v2(116.5,14.9)
  Bottom Layer w0.152: v1(103.5,29.875) 117.366,29.875 v1(120.578,33.086)
P0.29: P24.16 R59.1 U1.U31 U8.45 | length 80.9
  Top Layer w0.125: U1.U31@119.278,37.189 122.461,34.005 122.461,32.125 v1(122,31.664)
  Top Layer w0.152: P24.16@97.472,35.56 v2(97.472,36.385) ; v2(99.425,13.2) 99.453,13.228 99.453,13.333 99.476,13.356 99.476,13.77 99.475,13.772 99.475,17.79 100.193,18.508 100.193,19.22 101.705,20.732 101.705,24.918 103.675,26.888 v1(103.675,29.075) 104.025,29.425 104.025,30.2 103.875,30.35 103.875,34.05 103.55,34.375 103.55,35.85 v2(102.975,36.425) ; U8.45@117.278,16.609 117.278,15.572 117.775,15.075 R59.1@117.775,14.31
  Mid-Layer 1 w0.152: v2(97.472,36.385) 102.896,36.385 102.935,36.425 v2(102.975,36.425) ; v2(99.425,13.2) 105,13.2 106.525,14.725 116.075,14.725 116.425,14.375 116.875,14.375 117.25,14.75 v2(117.775,14.75)
  Bottom Layer w0.152: v1(103.675,29.075) 104.55,28.2 105.087,28.2 105.088,28.199 105.462,28.199 105.463,28.2 118.536,28.2 v1(122,31.664)
P0.30: P24.17 R36.1 U1.B24 U8.41 | length 94.8
  Top Layer w0.152: v2@91.482,14.418 91.482,17.713 91.218,17.977 91.167,17.977 91.077,18.066 91.077,25.623 90.83,25.87 90.83,32.08 91.199,32.449 91.199,32.461 91.757,33.02 P24.17@93.027,33.02 v2(93.027,34.227) ; v1(101.35,43.575) 101.375,43.575 101.665,43.285 101.665,38.41 103.932,36.143 v2@103.932,34.768 ; U8.41@115.678,16.609 115.678,14.422 v2(115.925,14.175) R36.1@115.925,13.86
  Mid-Layer 1 w0.125: v1(116.8,46.3) 116.375,45.875 116.375,44.61 117.378,43.608 117.378,40.566 117.678,40.266 v2(117.678,40.189)
  Mid-Layer 1 w0.152: v2(91.504,14.397) 95.536,14.397 96.132,13.801 98.299,13.801 99.251,12.849 105.124,12.849 106.675,14.4 115.713,14.4 115.925,14.188 v2(115.925,14.175) ; v2(93.027,34.227) 93.544,34.743 v2(103.932,34.743)
  Mid-Layer 2 w0.125: v1(101.35,43.575) 107.875,43.575 109.8,45.5 113.85,45.5 114.65,46.3 v1(116.8,46.3)
P0.31: P24.18 U1.B22 U16.B2 | length 88
  Top Layer w0.127: v2(119.175,13.25) U16.B2@119.175,13.775
  Top Layer w0.152: P24.18@97.472,33.02 97.472,34.122 v2(97.475,34.125) ; v2(100.25,11.681) 100.25,15.075 100.074,15.251 100.074,17.526 100.748,18.2 100.748,18.99 102.5,20.742 102.5,25.304 104.35,27.154 104.35,33.967 104.3,34.017 v2(104.3,34.375) ; v1(101.35,44.3) 101.943,43.707 101.943,38.582 104.3,36.225 v2@104.3,34.4
  Mid-Layer 1 w0.125: v1(116.125,46.75) 116.125,44.479 117.128,43.477 117.128,40.416 117.278,40.266 v2(117.278,40.189)
  Mid-Layer 1 w0.152: v2(97.475,34.125) 97.729,34.379 v2@104.279,34.379 ; v2(100.25,11.681) 105.606,11.681 107.95,14.025 112.2,14.025 112.7,13.525 116.1,13.525 116.55,13.975 118.45,13.975 v2(119.175,13.25)
  Mid-Layer 2 w0.125: v1(101.35,44.3) 101.825,43.825 107.771,43.825 109.696,45.75 113.7,45.75 114.7,46.75 v1(116.125,46.75)
P1.00: P3.1 P9.1 P15.2 SB29.1 U1.M2 | length 97.4
  Top Layer w0.152: SB29.1@82.611,22.225 82.611,23.1 83.425,23.914 83.425,30.86 83.185,31.1 v3(83.185,36.017) ; v2(88.392,36.017) v2(88.392,52.934)
  Top Layer w0.381: P3.1@63.5,54.415 v1(63.5,55.88) P3.1@63.5,57.345 P15.2@63.5,59.69
  Mid-Layer 1 w0.152: v1(63.5,55.88) 63.983,55.397 85.166,55.397 87.63,52.934 v2(88.392,52.934) ; v3(83.185,36.017) v2(88.392,36.017) 88.42,35.989 88.519,35.989 88.555,35.953 104.497,35.953 104.523,35.927 104.843,35.607 110.619,35.607 111.688,36.676 113.2,38.189 v2(113.278,38.189)
  Bottom Layer w0.381: P9.1@63.5,53.807 v1(63.5,55.88) P9.1@63.5,57.345
P1.01: P3.2 P9.2 P15.4 SB30.1 U1.P2 | length 106.3
  Top Layer w0.152: P3.2@60.96,53.797 P3.2@60.96,54.415 ; v3(79.4,35.662) 79.4,32.2 80.146,31.454 SB30.1@80.146,18.891 ; v2(88.036,35.662) v2(88.036,52.578)
  Top Layer w0.381: P3.2@60.96,54.415 v1(60.96,55.88) P3.2@60.96,57.345 P15.4@60.96,59.69
  Mid-Layer 1 w0.152: v1(60.96,55.88) 61.722,55.118 85.039,55.118 87.579,52.578 v2(88.036,52.578) ; v3(79.4,35.662) v2(88.036,35.662) ; v2@88.045,35.653 104.405,35.653 104.408,35.649 104.728,35.33 110.819,35.33 v2(113.278,37.789)
  Bottom Layer w0.381: P9.2@60.96,54.415 v1(60.96,55.88) P9.2@60.96,57.345
P1.02: P4.9 P10.9 P16.18 R20.1 U6.8 | length 92.7
  Top Layer w0.152: P4.9@21.336,53.823 P4.9@21.336,54.415 ; R20.1@72.339,42.906 v2(72.339,49.047) ; R20.1@72.365,42.906 R20.1@72.441,42.83 72.796,42.474 72.796,40.564 72.644,40.411 72.644,37.236 72.644,27.686 73.736,26.594 73.736,21.971 75.185,20.522 U6.8@75.185,20.316 ; v2@72.365,49.047 v2@72.365,49.098
  Top Layer w0.381: P4.9@21.336,54.415 v1(21.336,55.88) P4.9@21.336,57.345 P16.18@21.336,59.69
  Mid-Layer 1 w0.152: v1(21.336,55.88) 28.115,49.101 64.793,49.101 64.795,49.098 72.314,49.098 v2@72.365,49.047
  Bottom Layer w0.381: P10.9@21.336,54.415 v1(21.336,55.88) P10.9@21.336,57.345
P1.02/I2C: C29.2 R20.2 U1.AE1 | length 49.7
  Top Layer w0.125: v2(109.3,32.275) 111.55,32.275 111.709,32.434 111.709,33.045 111.953,33.289 111.953,34.688 112.853,35.589 U1.AE1@112.878,35.589
  Mid-Layer 1 w0.152: v2(72.441,41.999) 72.873,41.567 72.873,37.01 75.019,34.864 75.934,34.864 77.589,33.209 90.241,33.209 90.352,33.098 106.027,33.098 106.427,32.698 108.877,32.698 v2(109.3,32.275)
P1.03: P4.10 P10.10 P16.20 R24.1 U6.12 | length 96.8
  Top Layer w0.152: v2(71.984,48.743) 71.984,42.932 R24.1@71.882,42.83 71.526,42.474 71.526,40.64 72.288,39.878 72.288,26.848 73.15,25.986 73.15,19.331 73.99,18.491 U6.12@74.96,18.491
  Top Layer w0.381: P4.10@18.796,54.415 v1(18.796,55.88) P4.10@18.796,57.345 P16.20@18.796,59.69
  Mid-Layer 1 w0.152: v1(18.796,55.88) 25.933,48.743 v2@71.958,48.743
  Bottom Layer w0.381: P10.10@18.796,54.415 v1(18.796,55.88) P10.10@18.796,57.345
P1.03/I2C: C28.2 R24.2 U1.AF2 | length 49.2
  Mid-Layer 1 w0.125: 109.3,32.975 110.45,32.975 111.25,33.775 111.474,33.775 113.087,35.389 v2(113.278,35.389)
  Mid-Layer 1 w0.152: v2(71.882,41.999) 72.233,42.35 72.65,42.35 73.15,41.85 73.15,37.125 75.134,35.141 76.049,35.141 77.703,33.486 90.356,33.486 90.467,33.375 106.142,33.375 106.542,32.975 109.3,32.975
P1.04: P3.3 P9.3 P15.6 SB27.1 U1.AL19 | length 118
  Top Layer w0.125: U1.AL19@116.678,34.147 116.695,34.147 116.878,33.963 117.428,33.414 117.428,29.13 v2(118.948,27.61) ; U1.AL19@116.678,34.165 116.878,33.964
  Top Layer w0.15: U1.AL19@116.678,34.147 U1.AL19@116.678,34.189
  Top Layer w0.152: P3.3@58.42,53.823 P3.3@58.42,54.415 ; SB27.1@85.496,17.856 86.231,17.856 v2(86.475,18.1) ; v2(87.63,52.222) 87.63,52.172 87.681,52.121 87.681,35.331 87.782,35.23 v2(87.782,23.19) 87.782,22.368 88.8,21.35 v2(88.8,18.9)
  Top Layer w0.381: P3.3@58.42,54.415 v1(58.42,55.88) P3.3@58.42,57.345 P15.6@58.42,59.69
  Mid-Layer 1 w0.125: v2(87.782,23.19) 87.961,23.369 98.76,23.369 98.854,23.275 102.643,23.275 104.043,24.675 106.821,24.675 108.971,26.825 118.163,26.825 v2(118.948,27.61)
  Mid-Layer 1 w0.152: v1(58.42,55.88) 59.487,54.813 84.938,54.813 87.528,52.222 v2(87.63,52.222) ; v2(86.475,18.1) 87.275,18.9 v2(88.8,18.9)
  Bottom Layer w0.381: P9.3@58.42,54.415 v1(58.42,55.88) P9.3@58.42,57.345
P1.05: P3.4 P9.4 P15.8 SB28.1 U1.AK22 | length 114.6
  Top Layer w0.152: P3.4@55.88,53.823 P3.4@55.88,54.415 ; SB28.1@85.496,19.685 85.572,19.761 v2(85.979,19.761) ; v2(87.274,51.867) 87.401,51.74 87.401,35.103 87.427,35.077 v2(87.427,25.959) 87.427,22.273 88.4,21.3 v2(88.4,19.775)
  Top Layer w0.381: P3.4@55.88,54.415 v1(55.88,55.88) P3.4@55.88,57.345 P15.8@55.88,59.69
  Mid-Layer 1 w0.125: v2(87.427,25.959) 89.888,25.959 89.971,25.875 102.415,25.875 103.215,26.675 105.993,26.675 108.168,28.85 116.857,28.85 117.675,29.668 117.675,32.077 117.907,32.309 117.907,33.198 117.278,33.827 v2(117.278,34.589)
  Mid-Layer 1 w0.152: v1(55.88,55.88) 57.277,54.483 84.861,54.483 87.274,52.07 v2(87.274,51.867) ; v2(85.979,19.761) 88.386,19.761 v2(88.4,19.775)
  Bottom Layer w0.381: P9.4@55.88,54.415 v1(55.88,55.88) P9.4@55.88,57.345
P1.06: P3.5 P9.5 P15.10 SB5.1 U1.AL21 | length 149.6
  Top Layer w0.125: U1.AL21@117.078,34.165 117.078,34.118 117.128,34.067 117.678,33.517 117.678,29.363 v2(118.948,28.092)
  Top Layer w0.152: P3.5@53.34,53.823 P3.5@53.34,54.415 ; v2(86.919,51.511) 86.919,51.496 87.067,51.348 87.067,23.576 v2(87.071,23.571)
  Top Layer w0.254: v1(120.28,56.547) SB5.1@120.913,56.547
  Top Layer w0.381: P3.5@53.34,54.415 v1(53.34,55.88) P3.5@53.34,57.345 P15.10@53.34,59.69
  Mid-Layer 1 w0.125: v2(87.071,23.571) 87.105,23.605 87.218,23.605 87.232,23.619 98.863,23.619 98.957,23.525 102.539,23.525 103.939,24.925 106.718,24.925 108.867,27.075 117.931,27.075 v2(118.948,28.092)
  Mid-Layer 1 w0.152: v1(53.34,55.88) 55.016,54.204 84.734,54.204 86.919,52.019 v2(86.919,51.511) 103.436,51.511 104.877,52.952 109.452,52.952 112.702,56.202 118.11,56.202 118.908,57 119.828,57 v1(120.28,56.547)
  Bottom Layer w0.381: P9.5@53.34,54.415 v1(53.34,55.88) P9.5@53.34,57.345
P1.07: P3.6 P9.6 P15.12 SB6.1 U1.AK24 | length 147.6
  Top Layer w0.152: v2(86.563,51.156) 86.563,51.145 86.716,50.993 v2(86.716,25.603)
  Top Layer w0.254: v1(119.5,56.525) 119.5,56.015 120.246,55.27 SB6.1@120.913,55.27
  Top Layer w0.381: P3.6@50.8,54.415 v1(50.8,55.88) P3.6@50.8,57.345 P15.12@50.8,59.69
  Mid-Layer 1 w0.125: v2(86.716,25.603) 102.496,25.603 103.318,26.425 106.096,26.425 108.271,28.6 116.961,28.6 117.925,29.564 117.925,31.971 118.161,32.207 118.161,33.274 117.678,33.757 v2(117.678,34.589)
  Mid-Layer 1 w0.152: v1(50.8,55.88) 52.756,53.924 84.607,53.924 86.563,51.968 v2(86.563,51.156) 103.481,51.156 105,52.675 109.567,52.675 112.817,55.925 118.225,55.925 118.825,56.525 v1(119.5,56.525)
  Bottom Layer w0.381: P9.6@50.8,54.415 v1(50.8,55.88) P9.6@50.8,57.345